# Altium PCB DSP_Board.PcbDoc
Units mil, origin at the board's own origin, x right, y up, seen from the top; angles counter-clockwise.
Board outline 6000 x 4000 mil, 2 copper layers (Top Layer, Bottom Layer); 124 components, 152 nets, 528 pads, 23 vias.
Unrouted connection lines stored in the file: 156.
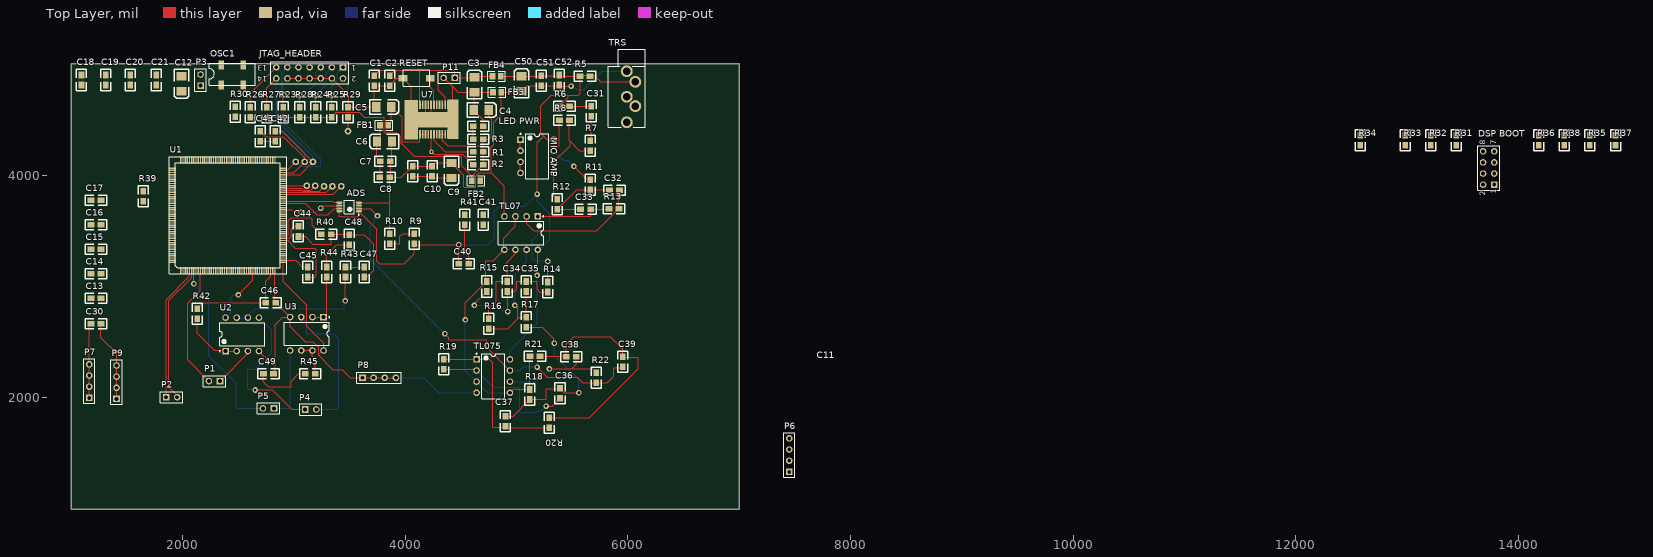
[diagram p0: Top Layer view]
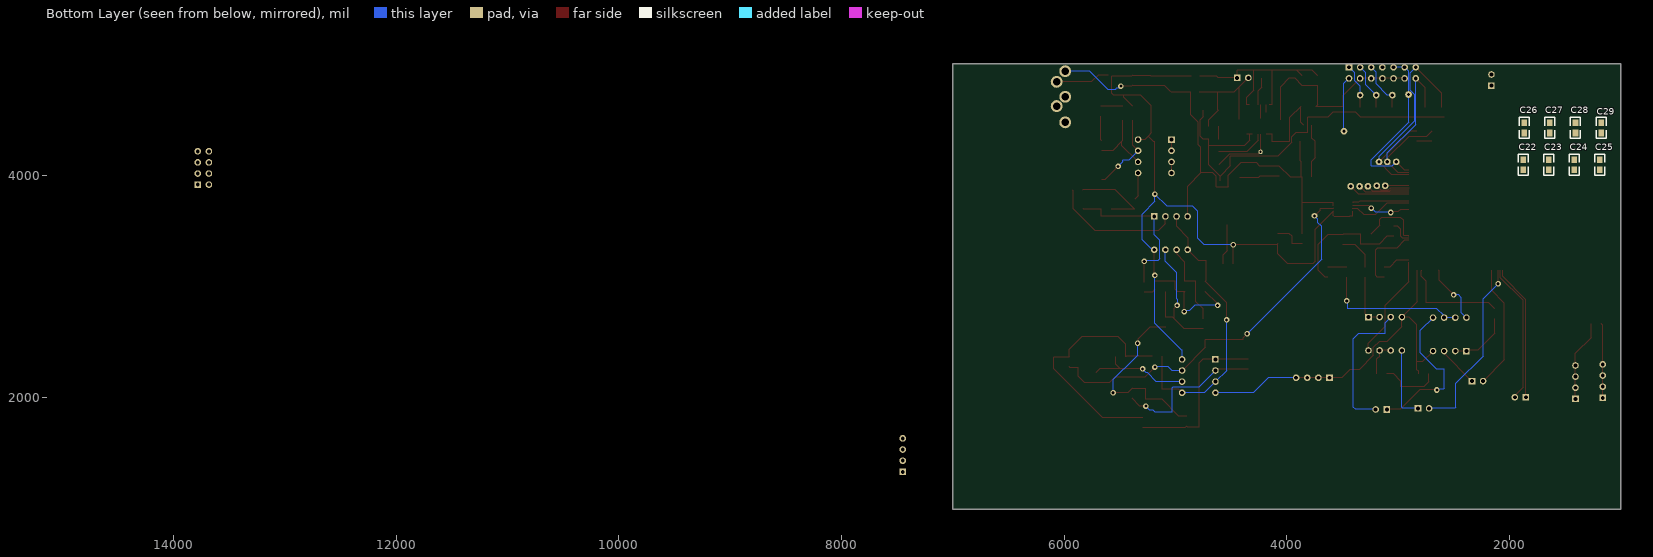
[diagram p1: Bottom Layer view, seen from below]

## Layer stack, top to bottom
Top Solder: solder mask 0.4, Solder Resist, Dk 3.5
Top Layer: signal copper 1.4
Dielectric 1: dielectric 12.6, FR-4, Dk 4.8
Bottom Layer: signal copper 1.4
Bottom Solder: solder mask 0.4, Solder Resist, Dk 3.5

## Board outline
1000,1000 7000,1000 7000,5000 1000,5000

## Design rules (kind name [scope] priority, off if disabled: settings)
Clearance [All] p1: gap=3
PolygonConnect [All] p1: connectstyle=Relief reliefconductorwidth=10 reliefentries=4 polygonreliefangle="90 Angle" airgapwidth=10
RoomDefinition TMS320F28335_DSP [InComponentClass('TMS320F28335_DSP')] p1: confinementstyle=ConfineIn formatcopy=TRUE lockcomponents=FALSE outline 0,0 2000,0 2000,1000 0,1000
RoomDefinition DSP_Power [InComponentClass('DSP_Power')] p2: confinementstyle=ConfineIn formatcopy=TRUE lockcomponents=FALSE outline 0,0 2000,0 2000,1000 0,1000
RoomDefinition DSP_Board_Headers [InComponentClass('DSP_Board_Headers')] p3: confinementstyle=ConfineIn formatcopy=TRUE lockcomponents=FALSE outline 7045,1945 10885,1945 10885,2465 7045,2465
RoomDefinition Audio_ADC [InComponentClass('Audio_ADC')] p4: confinementstyle=ConfineIn formatcopy=TRUE lockcomponents=FALSE outline 7045,1065 14680,1065 14680,1895 7045,1895
RoutingVias [All] p1: holewidth=10 width=20 viastyle="Through Hole" minholewidth=10 minwidth=20 maxholewidth=10 maxwidth=20
SolderMaskExpansion [All] p1: expansion=4
Width "Schematic Width Constraint" [InNet('+D5.0V')] p1: maxlimit=15 minlimit=11 preferedwidth=11
Width [All] p2: maxlimit=6 minlimit=6 preferedwidth=6
30 further rules are at their usual default settings.

## Classes and differential pairs
net class XD[0..15]: XD0 XD1 XD2 XD3 XD4 XD5 XD6 XD7 XD8 XD9 XD10 XD11 XD12 XD13 XD14 XD15
net class XA[0..19]: XA0 XA1 XA2 XA3 XA4 XA5 XA6 XA7 XA8 XA9 XA10 XA11 XA12 XA13 XA14 XA15 XA16 XA17 XA18 XA19
component class TMS320F28335_DSP: C41 C42 C43 C44 C45 "DSP BOOT" JTAG_HEADER OSC1 R23 R24 R25 R26 R27 R28 R29 R30 R31 R32 R33 R34 R35 R36 R37 R38 R39 R40 R41 U1
component class DSP_Power: C1 C2 C3 C4 C5 C6 C7 C8 C9 C10 C11 C12 C13 C14 C15 C16 C17 C18 C19 C20 C21 C22 C23 C24 C25 C26 C27 C28 C29 C30 C50 C51 C52 FB1 FB2 FB3 FB4 "LED PWR" R1 R2 R3 RESET U7
component class DSP_Board_Headers: C46 C47 C48 C49 P1 P2 P3 P4 P5 P6 P7 P8 P9 P11 R42 R43 R44 R45 U2 U3
component class Audio_ADC: ADS C31 C32 C33 C34 C35 C36 C37 C38 C39 C40 "MIC AMP" R5 R6 R7 R8 R9 R10 R11 R12 R13 R14 R15 R16 R17 R18 R19 R20 R21 R22 TL07 TL075 TRS

## Components (designator, comment, footprint, x,y, rotation, side; value= is the part's Value field where it differs from the comment)
ADS "ADS8320" TSOP65P490X110-8N 3495,3715 r180 top (schematic designator *)
C1 "Cap Semi" 0805 3720,4805 r90 top
C2 "Cap Semi" 0805 3860,4805 r90 top
C3 "10uF" 3528 4620,4880 r270 top
C4 "10uF" 3528 4750,4585 r180 top
C5 "10uF" 3528 3875,4615 r180 top
C6 "10uF" 3528 3745,4305 r0 top
C7 "Cap Semi" 0805 3865,4125 r180 top
C8 "Cap Semi" 0805 3860,3980 r180 top
C9 "10uF" 3528 4415,3975 r90 top
C10 "Cap Semi" 0805 4240,4080 r270 top
C11 "Cap Semi" 0805 4065,4080 r270 top
C12 "10uF" 3528 1990,4755 r90 top
C13 "Cap Semi" 0805 1265,2895 r180 top
C14 "Cap Semi" 0805 1265,3115 r180 top
C15 "Cap Semi" 0805 1265,3335 r180 top
C16 "Cap Semi" 0805 1265,3555 r180 top
C17 "Cap Semi" 0805 1265,3775 r180 top
C18 "Cap Semi" 0805 1090,4810 r90 top
C19 "Cap Semi" 0805 1310,4810 r90 top
C20 "Cap Semi" 0805 1530,4810 r90 top
C21 "Cap Semi" 0805 1760,4810 r90 top
C22 "Cap Semi" 0805 1875,4050 r90 bottom
C23 "Cap Semi" 0805 1645,4050 r90 bottom
C24 "Cap Semi" 0805 1415,4050 r90 bottom
C25 "Cap Semi" 0805 1185,4050 r90 bottom
C26 "Cap Semi" 0805 1865,4380 r90 bottom
C27 "Cap Semi" 0805 1635,4380 r90 bottom
C28 "Cap Semi" 0805 1405,4380 r90 bottom
C29 "Cap Semi" 0805 1175,4380 r90 bottom
C30 "Cap Semi" 0805 1265,2665 r180 top
C31 "Cap Semi" 0805 5670,4620 r270 top
C32 "Cap Semi" 0805 5835,3865 r0 top
C33 "Cap Semi" 0805 5575,3695 r0 top
C34 "Cap Semi" 0805 4915,2955 r90 top
C35 "Cap Semi" 0805 5085,3045 r270 top
C36 "Cap Semi" 0805 5390,2085 r270 top
C37 "Cap Semi" 0805 4900,1835 r270 top
C38 "Cap Semi" 0805 5445,2370 r0 top
C39 "Cap Semi" 0805 5955,2370 r270 top
C40 "Cap Semi" 0805 4480,3205 r0 top
C41 "Cap Semi" 0805 4700,3555 r90 top
C42 "Cap Semi" 0805 2830,4305 r90 top
C43 "Cap Semi" 0805 2695,4305 r90 top
C44 "Cap Semi" 0805 3040,3540 r270 top
C45 "Cap Semi" 0805 3125,3085 r90 top
C46 "Cap Semi" 0805 2835,2855 r180 top
C47 "Cap Semi" 0805 3631.25,3085 r90 top
C48 "Cap Semi" 0805 3495,3465 r270 top
C49 "Cap Semi" 0805 2815,2215 r180 top
C50 "10uF" 3528 5045,4890 r270 top
C51 "Cap Semi" 0805 5220,4805 r90 top
C52 "Cap Semi" 0805 5385,4810 r90 top
"DSP BOOT" "Header 4X2" HDR2X4 13785,3915 r90 top
FB1 "Ferrite_Bead" CR2012-0805 3810,4450 r180 top
FB2 "Ferrite_Bead" CR2012-0805 4635,3950 r0 top
FB3 "Ferrite_Bead" CR2012-0805 4825,4745 r0 top
FB4 "Ferrite_Bead" CR2012-0805 4820,4890 r0 top
JTAG_HEADER "Header 7X2" HDR2X7 3440,4970 r180 top
"LED PWR" "LED3" 0805 4610,4440 r0 top
"MIC AMP" "TL072" DIP-8 5185,4170 r0 top
OSC1 "Epson Oscillator" Oscillator 2345,4810 r0 top
P1 "Header 2" HDR1X2 2335,2150 r180 top
P2 "Header 2" HDR1X2 1850,2005 r0 top
P3 "Header 2" HDR1X2 2160,4805 r90 top
P4 "Header 2" HDR1X2 3100,1895 r0 top
P5 "Header 2" HDR1X2 2820,1905 r180 top
P6 "Header 4" HDR1X4 7450,1335 r90 top
P7 "Header 4" HDR1X4 1160,2000 r90 top
P8 "Header 4" HDR1X4 3615,2180 r0 top
P9 "Header 4" HDR1X4 1405,1990 r90 top
P11 "Header 2" HDR1X2 4445,4875 r180 top
R1 "Res" 0805 4610,4210 r0 top
R2 "Res" 0805 4610,4095 r0 top
R3 "Res" 0805 4700,4325 r180 top
R5 "Res" 0805 5570,4890 r0 top
R6 "Res" 0805 5475,4620 r180 top
R7 "Res" 0805 5660,4220 r90 top
R8 "Res" 0805 5385,4495 r0 top
R9 "Res" 0805 4080,3475 r270 top
R10 "Res" 0805 3860,3475 r270 top
R11 "Res" 0805 5660,3870 r90 top
R12 "Res" 0805 5365,3695 r90 top
R13 "Res" 0805 5830,3700 r0 top
R14 "Res" 0805 5280,2950 r90 top
R15 "Res" 0805 4730,3045 r270 top
R16 "Res" 0805 4750,2620 r90 top
R17 "Res" 0805 5085,2635 r90 top
R18 "Res" 0805 5120,2075 r270 top
R19 "Res" 0805 4345,2345 r270 top
R20 "Res" 0805 5295,1820 r270 top
R21 "Res" 0805 5120,2375 r0 top
R22 "Res" 0805 5715,2135 r90 top
R23 "Res" 0805 2905,4610 r270 top
R24 "Res" 0805 3195,4610 r270 top
R25 "Res" 0805 3340,4610 r270 top
R26 "Res" 0805 2605,4520 r90 top
R27 "Res" 0805 2755,4610 r270 top
R28 "Res" 0805 3050,4610 r270 top
R29 "Res" 0805 3485,4520 r90 top
R30 "Res" 0805 2470,4615 r270 top
R31 "Res" 0805 13445,4270 r90 top
R32 "Res" 0805 13215,4270 r90 top
R33 "Res" 0805 12985,4270 r90 top
R34 "Res" 0805 12580,4270 r90 top
R35 "Res" 0805 14645,4270 r90 top
R36 "Res" 0805 14185,4270 r90 top
R37 "Res" 0805 14875,4270 r90 top
R38 "Res" 0805 14415,4270 r90 top
R39 "Res" 0805 1645,3765 r90 top
R40 "Res" 0805 3335,3470 r180 top
R41 "Res" 0805 4535,3645 r270 top
R42 "Res" 0805 2130,2710 r90 top
R43 "Res" 0805 3462.5,3085 r90 top
R44 "Res" 0805 3293.75,3085 r90 top
R45 "Res" 0805 3190,2215 r180 top
RESET "SW-PB" SWITCH_2PAD_SMD 3980,4870 r0 top
TL07 "BPFS1" DIP-8 5040,3480 r270 top
TL075 "BPFS3" DIP-8 4790,2195 r0 top
TRS "3.5mm jack GM" "3.5mm jack GM" 5990,4935 r180 top
U1 "TMS320F28335GF" QFP176 2405,3640 r90 top
U2 "LT1632CN8" DIP-8 2535,2570 r90 top
U3 "LT1632CN8" DIP-8 3115,2575 r270 top
U7 "TPS70351" PWP24 4240,4500 r270 top

## Footprints (in the part's own frame and the unit in brackets; to place one, negate y for a bottom-side part, rotate by r counter-clockwise, add the part's x,y. Pads: shape width x height; smd on the part's side, far side on the other; paste and mask are expansions set on the pad)
"3.5mm jack GM" [mil]
  round 106.5 hole 66.5: 1(0,0) 2(-77,96) 3(0,230) 4(-77,314) 5(0,460)
  silkscreen extent -165,-195 165,505
0805 [mil]
  rect 60x50 smd: 1(0,0) 2(90,0)
  silkscreen extent -50,-45 140,45
3528 [mil]
  rect 75x90 smd: 1(0,0) 2(135,0)
  silkscreen extent -65,-65 195,65
CR2012-0805 [mm]
  rect 1.3x1.5 smd: 1(-0.95,0) 2(0.95,0)
  silkscreen extent -2,-1.15 2,1.15
DIP-8 [mm] "DIP; 8 Leads; Row Spacing 7.62 mm; Pitch 2.54 mm"
  rect 1.5x1.5 hole 0.9: 1(-3.81,3.81)
  round 1.5 hole 0.9: 2(-3.81,1.27) 3(-3.81,-1.27) 4(-3.81,-3.81) 5(3.81,-3.81) 6(3.81,-1.27) 7(3.81,1.27) 8(3.81,3.81)
  silkscreen extent -3.93,-5.15 2.65,5.23, body extent -3.6,-5.15 3.6,5.15, height 5.08
HDR1X2 [mm] "Connector; Header; 2 Position"
  rect 1.5x1.5 hole 0.9: 1(0,0)
  round 1.5 hole 0.9: 2(2.54,0)
  silkscreen extent -1.27,-1.27 3.81,1.27
HDR1X4 [mm] "Connector; Header; 4 Position"
  rect 1.5x1.5 hole 0.9: 1(0,0)
  round 1.5 hole 0.9: 2(2.54,0) 3(5.08,0) 4(7.62,0)
  silkscreen extent -1.27,-1.27 8.89,1.27
HDR2X4 [mm] "Connector; Header; 4x2 Position"
  rect 1.5x1.5 hole 0.9: 1(0,0)
  round 1.5 hole 0.9: 2(0,2.54) 3(2.54,0) 4(2.54,2.54) 5(5.08,0) 6(5.08,2.54) 7(7.62,0) 8(7.62,2.54)
  silkscreen extent -1.27,-1.27 8.89,3.81
HDR2X7 [mm] "Connector; Header; 7x2 Position"
  rect 1.5x1.5 hole 0.9: 1(0,0)
  round 1.5 hole 0.9: 2(0,2.54) 3(2.54,0) 4(2.54,2.54) 5(5.08,0) 6(5.08,2.54) 7(7.62,0) 8(7.62,2.54) 9(10.16,0) 10(10.16,2.54) 11(12.7,0) 12(12.7,2.54) 13(15.24,0) 14(15.24,2.54)
  silkscreen extent -1.27,-1.27 16.51,3.81
Oscillator [mm]
  rect 1.3x2.1 smd: 1(0,0) 2(5.08,0) 3(5.08,4.6) 4(0,4.6)
  silkscreen extent -2.67,0 7.83,5
PWP24 [mm]
  rect 1.95x0.4 smd: 1(-3.366,3.632) 2(-3.366,2.997) 3(-3.366,2.352) 4(-3.365,1.712) 5(-3.365,1.072) 6(-3.365,0.432) 7(-3.365,-0.208) 8(-3.365,-0.848) 9(-3.365,-1.488) 10(-3.365,-2.128) 11(-3.365,-2.768) 12(-3.365,-3.48) 13(3.366,-3.48) 14(3.358,-2.768) 15(3.358,-2.128) 16(3.358,-1.488) 17(3.358,-0.848) 18(3.358,-0.208) 19(3.358,0.432) 20(3.358,1.072) 21(3.358,1.712) 22(3.358,2.352) 23(3.365,2.997) 24(3.365,3.632)
  rect 9x2.54 smd: 1(-0.064,4.75)
  rect 3.5x7.9 smd: 1(0.063,0.203)
  rect 9x3 smd: 1(0.064,-4.75)
QFP176 [mil]
  rect 63x11.8 smd: 1(-496.1,423.2) 2(-496.1,403.5) 3(-496.1,383.9) 4(-496.1,364.2) 5(-496.1,344.5) 6(-496.1,324.8) 7(-496.1,305.1) 8(-496.1,285.4) 9(-496.1,265.7) 10(-496.1,246.1) 11(-496.1,226.4) 12(-496.1,206.7) 13(-496.1,187) 14(-496.1,167.3) 15(-496.1,147.6) 16(-496.1,128) 17(-496.1,108.3) 18(-496.1,88.6) 19(-496.1,68.9) 20(-496.1,49.2) 21(-496.1,29.5) 22(-496.1,9.8) 23(-496.1,-9.8) 24(-496.1,-29.5) 25(-496.1,-49.2) 26(-496.1,-68.9) 27(-496.1,-88.6) 28(-496.1,-108.3) 29(-496.1,-128) 30(-496.1,-147.6) 31(-496.1,-167.3) 32(-496.1,-187) 33(-496.1,-206.7) 34(-496.1,-226.4) 35(-496.1,-246.1) 36(-496.1,-265.7) 37(-496.1,-285.4) 38(-496.1,-305.1) 39(-496.1,-324.8) 40(-496.1,-344.5) 41(-496.1,-364.2) 42(-496.1,-383.9) 43(-496.1,-403.5) 44(-496.1,-423.2) 89(496.1,-423.2) 90(496.1,-403.5) 91(496.1,-383.9) 92(496.1,-364.2) 93(496.1,-344.5) 94(496.1,-324.8) 95(496.1,-305.1) 96(496.1,-285.4) 97(496.1,-265.7) 98(496.1,-246.1) 99(496.1,-226.4) 100(496.1,-206.7) 101(496.1,-187) 102(496.1,-167.3) 103(496.1,-147.6) 104(496.1,-128) 105(496.1,-108.3) 106(496.1,-88.6) 107(496.1,-68.9) 108(496.1,-49.2) 109(496.1,-29.5) 110(496.1,-9.8) 111(496.1,9.8) 112(496.1,29.5) 113(496.1,49.2) 114(496.1,68.9) 115(496.1,88.6) 116(496.1,108.3) 117(496.1,128) 118(496.1,147.6) 119(496.1,167.3) 120(496.1,187) 121(496.1,206.7) 122(496.1,226.4) 123(496.1,246.1) 124(496.1,265.7) 125(496.1,285.4) 126(496.1,305.1) 127(496.1,324.8) 128(496.1,344.5) 129(496.1,364.2) 130(496.1,383.9) 131(496.1,403.5) 132(496.1,423.2)
  rect 11.8x63 smd: 45(-423.2,-496.1) 46(-403.5,-496.1) 47(-383.9,-496.1) 48(-364.2,-496.1) 49(-344.5,-496.1) 50(-324.8,-496.1) 51(-305.1,-496.1) 52(-285.4,-496.1) 53(-265.7,-496.1) 54(-246.1,-496.1) 55(-226.4,-496.1) 56(-206.7,-496.1) 57(-187,-496.1) 58(-167.3,-496.1) 59(-147.6,-496.1) 60(-128,-496.1) 61(-108.3,-496.1) 62(-88.6,-496.1) 63(-68.9,-496.1) 64(-49.2,-496.1) 65(-29.5,-496.1) 66(-9.8,-496.1) 67(9.8,-496.1) 68(29.5,-496.1) 69(49.2,-496.1) 70(68.9,-496.1) 71(88.6,-496.1) 72(108.3,-496.1) 73(128,-496.1) 74(147.6,-496.1) 75(167.3,-496.1) 76(187,-496.1) 77(206.7,-496.1) 78(226.4,-496.1) 79(246.1,-496.1) 80(265.7,-496.1) 81(285.4,-496.1) 82(305.1,-496.1) 83(324.8,-496.1) 84(344.5,-496.1) 85(364.2,-496.1) 86(383.9,-496.1) 87(403.5,-496.1) 88(423.2,-496.1) 133(423.2,496.1) 134(403.5,496.1) 135(383.9,496.1) 136(364.2,496.1) 137(344.5,496.1) 138(324.8,496.1) 139(305.1,496.1) 140(285.4,496.1) 141(265.7,496.1) 142(246.1,496.1) 143(226.4,496.1) 144(206.7,496.1) 145(187,496.1) 146(167.3,496.1) 147(147.6,496.1) 148(128,496.1) 149(108.3,496.1) 150(88.6,496.1) 151(68.9,496.1) 152(49.2,496.1) 153(29.5,496.1) 154(9.8,496.1) 155(-9.8,496.1) 156(-29.5,496.1) 157(-49.2,496.1) 158(-68.9,496.1) 159(-88.6,496.1) 160(-108.3,496.1) 161(-128,496.1) 162(-147.6,496.1) 163(-167.3,496.1) 164(-187,496.1) 165(-206.7,496.1) 166(-226.4,496.1) 167(-246.1,496.1) 168(-265.7,496.1) 169(-285.4,496.1) 170(-305.1,496.1) 171(-324.8,496.1) 172(-344.5,496.1) 173(-364.2,496.1) 174(-383.9,496.1) 175(-403.5,496.1) 176(-423.2,496.1)
  silkscreen extent -528,-528 528,528
SWITCH_2PAD_SMD [mm]
  rect 2x1.5 smd: 1(0,0) 2(6.2,0)
  silkscreen extent 0,-1.78 6.1,1.92
TSOP65P490X110-8N [mm] "TSOP, 8-Leads, Body 3.00x3.00mm, Pitch 0.65mm, IPC Medium Density"
  oval 1.35x0.5 smd: 1(-2.225,0.975) 2(-2.225,0.325) 3(-2.225,-0.325) 4(-2.225,-0.975) 5(2.225,-0.975) 6(2.225,-0.325) 7(2.225,0.325) 8(2.225,0.975)
  silkscreen extent -2.35,-1.55 1.15,1.9, body extent -1.55,-1.55 1.55,1.55, height 1.1

## Part data
C1 C2 C7 C8 C10 C11 C13 C14 C15 C16 C17 C18 C19 C20 C21 C22 C23 C24 C25 C26 C27 C28 C29 C30 C31 C32 C33 C34 C35 C36 C37 C38 C39 C40 C41 C42 C43 C44 C45 C46 C47 C48 C49 C51 C52: "Capacitor (Semiconductor SIM Model)"
C3: library part "CAPACITOR POL", "digi-399-1563-1-ND"
C4 C6 C9 C50: library part "CAPACITOR POL", "digi-399-3096-1-ND"
C5 C12: library part "CAPACITOR POL", "digi-399-1576-1-ND"
"DSP BOOT": "Header, 4-Pin, Dual row"
FB1 FB2 FB3 FB4: "Ferrite Bead"
JTAG_HEADER: "Header, 7-Pin, Dual row"
"LED PWR": "Typical BLUE SiC LED"
"MIC AMP" TL07 TL075: library part LT1632CN8, "45MHz, 45V/µs, Dual Rail-to-Rail Input and Output Precision Operational Amplifier"
OSC1: library part Oscillator, "15Mhz Epson Clock"
P1 P2 P3 P4 P5 P11: "Header, 2-Pin"
P6 P7 P8 P9: "Header, 4-Pin"
R1 R2 R3 R5 R6 R7 R8 R9 R10 R11 R12 R13 R14 R15 R16 R17 R18 R19 R20 R21 R22 R23 R24 R25 R26 R27 R28 R29 R30 R31 R32 R33 R34 R35 R36 R37 R38 R39 R40 R41 R42 R43 R44 R45: library part "Res Semi", "Semiconductor Resistor"
RESET: "Switch"
U1: library part TMS320F283XXPGF_23, "Texas Instruments F28335"
U2 U3: "45MHz, 45V/µs, Dual Rail-to-Rail Input and Output Precision Operational Amplifier"
U7: "IC 3.3V/1.8V LDO REG 24-HTSSOP"

## Free pads (board coordinates)
  round 40 hole 20: 2(4235,4210)
  round 60 hole 30: 4(3340,4720) 5(3195,4720) 6(3050,4720) 8(3485,4395) 9(2905,4725) 20(3015,4120) 21(3095,4120) 22(3170,4120) 23(3115,3905) 24(3190,3905) 25(3270,3900) 26(3345,3900) 27(3425,3900)

## Via types
v1: diameter 50, hole 28, Top Layer to Bottom Layer, 23 vias

## Nets (pads, with @x,y where several pads share a name; then routed paths per layer and width w, separated by ;. In a path a pad name is that pad's centre, name@x,y a point inside that pad or via, vN(x,y) a via of type N, cw(c..) or ccw(c..) an arc to the next point about the centre after c; other vN are vias at no path point)
+A1.8V: C6.1 C7.2 C8.2 FB1.2 U1.31 U1.59 | length 488.9
  Top Layer w6: FB1.2 3772.6,4332.6 C6.1 3745,4155 C7.2 C8.2@3775,3985
+A2.5V: "MIC AMP.5" R9.1 R10.2 R12.2 R15.1 R18.1 R21.1 TL07.3 TL07.5 TL075.3 TL075.5 | length 3135.8
  Top Layer w6: R10.2 3950,3385 3950,3450 3975,3475 R9.1 ; v1(4540,2700) 4540,2855 R15.1 4725,3050 4725,3230 4790,3230 TL07.5 4885,3335 4885,3435 4990,3540 TL07.3 ; TL075.5 4970,2075 R18.1 R21.1 ; 5335,4020 5335,3815 R12.2
  Bottom Layer w6: v1(4540,2700) 4540,2245 TL075.3 4740,2045 TL075.5
+A3.3V: C9.1 C10.2 C11.2 FB2.2 U1.34 U1.45 U2.8 U3.8 | length 1856.1
  Top Layer w6: v1(2500,2925) 2630,3055 2630,3142.5 U1.34 ; U1.45 2901.1,3043.9 3112.5,2832.5 3112.5,2642.5 3265,2490 U3.8 ; C11.2 C10.2 4255,3975 C9.1 C9.1@4420,3975
  Bottom Layer w6: U2.8 2430,2765 2430,2900 2455,2925 v1(2500,2925)
+A5.0V: "MIC AMP.8" ADS.1 ADS.8 C40.1 C50.1 C51.2 C52.2 FB4.2 R5.1 R6.2 R9.2 TL07.8 TL075.8 | length 6909.3
  Top Layer w6: ADS.8 3407.4,3632.6 3410,3630 3435,3630 3440,3625 3570,3625 3582.6,3637.6 ADS.1 3745,3514.21 3745,3225 3765,3205 3990,3205 4080,3295 R9.2 4090,3375 v1(4480,3375) C40.1 ; FB4.2 C50.1 5215,4890 C51.2 5380,4895 C52.2 5395,4890 R5.1 5570,4735 5555,4720 5465,4720 ; v1(5185,3100) 5190,3105 TL07.8 ; v1(5185,3830) 5185,4300 5195,4300 5245,4350 ; 5335,4320 5275,4320 5245,4350 ; R6.2 5465,4700 5465,4720 ; 5245,4350 5215,4380 5215,4625 5310,4720 5465,4720
  Bottom Layer w6: v1(4480,3375) 4740,3375 4800,3435 4800,3675 4845,3720 5075,3720 v1(5185,3830) 5185,3765 5300,3650 5300,3420 5210,3330 TL07.8 ; TL075.8 4940,2427.5 4942.5,2427.5 5185,2670 v1(5185,3100)
+D1.8V: C5.1 C12.1 C13.2 C14.2 C15.2 C16.2 C17.2 C18.2 C19.2 C20.2 C21.2 FB1.1 U1.4 U1.15 U1.23 U1.29 U1.61 U1.101 U1.109 U1.117 U1.126 U1.139 U1.146 U1.154 U1.167 U7.14 U7.15 U7.16 | length 807.3
  Top Layer w6: FB1.1 3875,4477.6 C5.1 3971.02,4518.98 3971.02,4301.02 4131.02,4301.02 U7.14 U7.15 U7.16
+D3.3V: C4.1 C22.2 C23.2 C24.2 C25.2 C26.2 C27.2 C28.2 C29.2 C30.2 FB2.1 OSC1.1 OSC1.4 P7.1 P7.2 P7.3 P7.4 R1.2 R2.2 R3.1 R23.2 R24.2 R25.2 R26.1 R27.2 R28.2 R35.1 R36.1 R37.1 R38.1 U1.9 U1.71 U1.84 U1.93 U1.107 U1.121 U1.143 U1.159 U1.170 U7.21 U7.22 U7.23 | length 5241.4
  Top Layer w6: P7.1 P7.2 P7.3 P7.4 1160,2650 C30.2 ; R27.2@2735,4520 R26.1@2585,4520 ; R23.2@2885,4520 R26.1@2585,4520 ; R28.2@3035,4520 R26.1@2585,4520 ; U7.21 U7.22 ; U7.23@4357.72,4367.78 U7.22 ; FB2.1 4597.6,3992.6 ; C4.1 4750,4525 4775,4500 4775,4350 4750,4325 R3.1 4700,4265 ; R26.1@2585,4520 3335,4520 3380,4565 3585,4565 3630,4520 3810,4520 3810,4380 3920,4380 3955,4345 3955,4295 4080,4170 4505,4170 4505,4085.2 4597.6,3992.6 ; U7.22 4332.6,4312.4 4380,4265 4700,4265 ; 4597.6,3992.6 R2.2 R1.2 4700,4265
+D5.0V: C1.2 C2.2 C3.1 FB4.1 P6.1 P6.2 P6.3 P6.4 P11.1 U7.2 U7.3 U7.10 U7.11 | length 1929.7
  Top Layer w11: C1.2 3770,4945 3910,4945 ; C2.2 3910,4945 ; U7.10@4155.2,4633.52 4130,4633.52 4130,4945 ; U7.3@4334.61,4634.51 4360,4634.51 4360,4700 4295,4765 4295,4945 ; FB4.1 4630,4890 C3.1 4615,4875 P11.1 4445,4945 4295,4945 ; 3910,4945 4130,4945 ; 4130,4945 4295,4945
/RST_SWITCH: RESET.2 U7.6 | length 251.1
  Top Layer w6: RESET.2 4224.09,4790.91 4257.01,4757.99 U7.6
ADCINA0: C46.2 R42.2 U1.42 | length 945.8
  Top Layer w6: R42.2 2185,2855 C46.2 2745,3045 2790,3090 2790,3142.8 U1.42
ADCINA1: C47.2 R43.2 U1.41 | length 168.8
  Top Layer w6: R43.2 C47.2
ADCINA2: C48.2 R44.2 U1.40 | length 347.8
  Top Layer w6: R44.2 3293.75,3283.75 3385,3375 C48.2
ADCINA3: C49.2 R45.2 U1.39 | length 540.6
  Top Layer w6: C49.2 2725,2145 2770,2100 2975,2100 2975,2150 3040,2215 R45.2
ADCREFIN: U1.54
ADCREFM: C45.1 U1.55 | length 644.7
  Top Layer w6: U1.55 2941.4,3413.6 3010,3345 3185,3345 3200,3330 3200,3100 3185,3085 C45.1
ADCREFP: C44.1 U1.56 | length 221.2
  Top Layer w6: U1.56 2958.3,3433.3 2975,3450 2975,3515 3000,3540 C44.1
ADCRESEXT: R40.2 U1.57 | length 586.5
  Top Layer w6: U1.57 2903.1,3455 2945,3455 2950,3460 2950,3595 2975,3620 3150,3620 3165,3605 3165,3550 R40.2
ADS_CSN: ADS.5 U1.73 | length 512.4
  Top Layer w6: U1.73 3342,3768 3355,3755 3405.79,3755 ADS.5
ADS_DCLK: ADS.7 U1.72 | length 572.8
  Top Layer w6: U1.72 3101.7,3748.3 3205,3645 3305,3645 3360,3700 3405.2,3700 ADS.7
ADS_DOUT: ADS.6 U1.69 | length 542.3
  Top Layer w6: U1.69 2980.8,3689.2 3000,3670 3060,3670 v1(3065,3665) ; v1(3240,3705) 3260,3725 3285,3725 3287.8,3727.8 ADS.6
  Bottom Layer w6: v1(3065,3665) 3200,3665 v1(3240,3705)
AGND: "MIC AMP.3" "MIC AMP.4" ADS.3 ADS.4 C6.2 C7.1 C8.1 C9.2 C10.1 C11.1 C44.2 C45.2 C46.1 C47.1 C48.1 C49.1 C50.2 C51.1 C52.1 FB3.2 P8.1 P8.2 P8.3 P8.4 R10.1 R40.1 TL07.4 TL075.4 TRS.1 U1.32 U1.33 U1.35 U1.36 U1.37 U1.38 U1.43 U1.44 U1.46 U1.47 U1.48 U1.49 U1.50 U1.51 U1.52 U1.53 U1.58 U2.4 U3.4 | length 9641
  Top Layer w6: U2.4 2780,2325 2830,2325 ; C49.1 2815,2238.75 2830,2253.75 2830,2325 ; U1.44 2828.2,2861.8 C46.1 U3.4 ; U1.46 2902.6,3235 3015,3235 3075,3175 C45.2 ; C44.2 3100,3450 3170,3380 3335,3380 R40.1 3490,3470 C48.1 3630,3465 3715,3380 3715,3145 3655,3085 C47.1 ; ADS.3 ADS.4 3858.39,3753.39 3860,3755 ; R10.1 3860,3755 ; C8.1@3870,3990 3870,4120 3880,4130 C6.2 ; P8.4 P8.3 P8.2 P8.1 3505,2180 3435,2250 3350,2250 3220,2380 3220,2455 3170,2505 3100,2505 2965,2640 U3.4 ; TL07.4 4890,3900 4770,4020 ; 5035,4020 5035,4120 ; v1(5490,4800) 5395,4800 C52.1 5380,4805 C51.1 5095,4805 C50.2 5035,4745 FB3.2 4862.4,4542.4 4795,4475 4795,4275 4770,4250 4770,4020 ; 2830,2325 2830,2655 2900,2725 U3.4 ; 3860,3755 C8.1 3965,3980 C11.1 C10.1 4270,4110 C9.2 4525,4000 4525,3895 4530,3890 4630,3890 4635,3895 4635,3990 4665,4020 4770,4020
  Bottom Layer w6: P8.4 4165,2180 4300,2045 TL075.4 ; v1(5490,4800) 5510,4780 5530,4780 5540,4770 5605,4770 5770,4935 TRS.1
EMU0_DSP: C42.2 JTAG_HEADER.13 pad.22 R26.2 U1.85 | length 2247.9
  Top Layer w6: R26.2 2605,4735 JTAG_HEADER.13 ; C42.2 2895,4395 pad.22 3054.2,4004.2 U1.85
  Bottom Layer w6: JTAG_HEADER.13 2890,4920 2890,4765 2850,4725 2850,4490 3170,4170 pad.22
EMU1_DSP: C43.2 JTAG_HEADER.14 pad.21 R27.1 U1.86 | length 1918.9
  Top Layer w6: C43.2 2745,4345 2905,4345 3095,4155 pad.21 2998.9,4023.9 U1.86 ; R27.1 2755,4785 JTAG_HEADER.14
  Bottom Layer w6: JTAG_HEADER.14 2840,4455 3095,4200 pad.21
"FILTER OUT": ADS.2 C39.2 R22.1 TL075.7 | length 3533.5
  Top Layer w6: ADS.2 3584.8,3700 3700,3700 3700,3685 v1(3750,3635) ; v1(4355,2575) 4390,2540 4390,2520 4730,2520 4730,2455 TL075.7 ; v1(5185,2275) 5275,2185 5545,2185 5595,2135 R22.1 5815,2135 5875,2195 5875,2270 5945,2270 C39.2
  Bottom Layer w6: v1(3750,3635) 3720,3605 3720,3575 3685,3540 3685,3245 v1(4355,2575) ; TL075.7 5030,2245 5065,2280 5180,2280 v1(5185,2275)
GND: "LED PWR.2" C1.1 C2.1 C3.2 C4.2 C5.2 C12.2 C13.1 C14.1 C15.1 C16.1 C17.1 C18.1 C19.1 C20.1 C21.1 C22.1 C23.1 C24.1 C25.1 C26.1 C27.1 C28.1 C29.1 C30.1 C40.2 C41.1 C42.1 C43.1 FB3.1 JTAG_HEADER.4 JTAG_HEADER.6 JTAG_HEADER.8 JTAG_HEADER.10 JTAG_HEADER.12 OSC1.2 P9.1 P9.2 P9.3 P9.4 P11.2 R29.2 R31.2 R32.2 R33.2 R34.2 R41.2 RESET.1 U1.3 U1.8 U1.14 U1.22 U1.30 U1.60 U1.70 U1.83 U1.92 U1.103 U1.104 U1.106 U1.108 U1.118 U1.120 U1.125 U1.140 U1.144 U1.147 U1.155 U1.160 U1.166 U1.171 U7.1 U7.7 U7.9 U7.12 U7.13 U7.24 | length 4404
  Top Layer w6: C30.1 1265,2540 1405,2400 P9.4 P9.3 P9.2 P9.1 ; C43.1 C42.1 ; JTAG_HEADER.12 JTAG_HEADER.10 JTAG_HEADER.8 JTAG_HEADER.6 JTAG_HEADER.4 3490,4720 3490,4615 C5.2 3720,4635 C1.1 C2.1 3925,4870 RESET.1 4052.99,4797.01 U7.1@4052.99,4497.5 ; U7.1@4181.42,4564.07 U7.9 ; U7.1@4231.81,4513.68 U7.7 ; P11.2 4427.01,4792.99 ; U7.1@4427.01,4502.5 4427.01,4792.99 ; R41.2 4535,3320 4570,3285 C40.2 ; 4700,4440 4700,4500 C4.2 4620,4590 C3.2 ; FB3.1 C3.2 ; 4427.01,4792.99 4475,4745 C3.2
GPIO4: U1.11
GPIO5: U1.12
GPIO6: U1.13
GPIO7: U1.16
GPIO8: U1.17
GPIO9: U1.18
GPIO10: U1.19
GPIO11: U1.20
GPIO12: U1.21
GPIO13: U1.24
GPIO14: U1.25
GPIO15: U1.26
GPIO16: U1.27
GPIO17: U1.28
GPIO18: U1.62
GPIO19: U1.63
GPIO20: U1.64
GPIO21: U1.65
GPIO22: U1.66
GPIO23: U1.67
GPIO24: U1.68
GPIO32: U1.74
GPIO33: U1.75
GPIO48: U1.88
GPIO49: U1.89
GPIO50: U1.90
GPIO51: U1.91
GPIO52: U1.94
GPIO53: U1.95
GPIO54: U1.96
GPIO55: U1.97
GPIO56: U1.98
GPIO57: U1.99
GPIO58: U1.100
GPIO59: U1.110
GPIO60: U1.111
GPIO61: U1.112
LED_ENABLE: P2.2 U1.6 | length 1255
  Top Layer w6: P2.2 1950,2020 1875,2095 1875,2875 2080.2,3080.2 U1.6
LIGHTSENSE: P4.2 U3.3 | length 1297.6
  Bottom Layer w6: U3.3 3115,2675 3115,2575 3355,2575 3400,2530 3400,1915 3380,1895 P4.2
LOCK_ENABLE: P1.2 U1.10 | length 1119.8
  Top Layer w6: U1.10 2158.9,2965 2045,2851.1 2045,2340 P1.2
MAGSENSE: P1.1 U2.3 | length 373.6
  Top Layer w6: P1.1 2585,2400 U2.3
"MIC OUT": "MIC AMP.7" R8.1 R11.2 | length 737.2
  Top Layer w6: 5335,4220 5385,4270 R8.1 ; v1(5515,4080) 5635,3960 R11.2
  Bottom Layer w6: 5335,4220 5420,4135 5475,4135 5475,4120 v1(5515,4080)
NetC31_1: C31.1 R6.1 TRS.4 | length 195
  Top Layer w6: R6.1 C31.1
NetC31_2: C31.2 R7.2 | length 224.1
  Top Layer w6: R7.2 5670,4320 C31.2
NetC32_1: C32.1 C33.1 R11.1 R12.1 | length 754.6
  Top Layer w6: C33.1 R12.1 5540,3870 R11.1 5830,3870 C32.1
NetC32_2: C32.2 R13.2 TL07.2 | length 1171.8
  Top Layer w6: TL07.2 5090,3565 5155,3500 5720,3500 R13.2 5920,3860 C32.2
NetC33_2: C33.2 R13.1 R14.2 TL07.1 | length 1443.1
  Top Layer w6: TL07.1 5665,3630 C33.2 5825,3695 R13.1 ; R14.2 v1(5280,3225)
  Bottom Layer w6: TL07.1 5190,3465 5140,3415 5140,3250 5160,3230 5275,3230 v1(5280,3225)
NetC34_1: C34.1 C35.1 R14.1 R15.2 | length 1199.1
  Top Layer w6: v1(4620,2830) 4620,2845 R15.2 ; v1(4920,2775) 4920,2950 C34.1 4980,2955 5000,2975 5000,3045 C35.1 5185,3045 5185,2975 5210,2950 R14.1
  Bottom Layer w6: v1(4620,2830) 4825,2830 4875,2780 4915,2780 v1(4920,2775)
NetC34_2: C34.2 R16.2 TL07.6 | length 778
  Top Layer w6: R16.2 4750,2800 4815,2865 4815,3045 C34.2 4915,3220 4990,3295 TL07.6
NetC35_2: C35.2 R16.1 R17.2 TL07.7 | length 1286.5
  Top Layer w6: R16.1 4920,2620 5010,2710 ; v1(4985,2830) 5010,2805 5010,2710 ; C35.2 R17.2 5025,2725 5010,2710
  Bottom Layer w6: v1(4985,2830) 4980,2835 4980,2880 4990,2890 4990,3125 5090,3225 TL07.7
NetC36_1: C36.1 C37.1 R17.1 R18.2 | length 1710.4
  Top Layer w6: C37.1 4970,1835 R18.2 5265,1985 5265,2080 5385,2080 C36.1 5430,2045 v1(5560,2045) ; R17.1 5230,2635 5335,2530 5335,2495 v1(5340,2490)
  Bottom Layer w6: v1(5340,2490) 5340,2380 5465,2255 5470,2255 5560,2165 v1(5560,2045)
NetC36_2: C36.2 R19.2 TL075.2 | length 1385.1
  Top Layer w6: R19.2 4630,2255 TL075.2 ; v1(5265,1925) 5320,1925 C36.2
  Bottom Layer w6: TL075.2 4790,2095 5025,2095 5030,2090 5030,1870 5180,1870 5200,1890 5230,1890 v1(5265,1925)
NetC37_2: C37.2 R19.1 R20.2 TL075.1 | length 1552.8
  Top Layer w6: R19.1 TL075.1 4755,2345 4785,2315 4785,1735 4890,1735 C37.2 4915,1730 R20.2
NetC38_1: C38.1 C39.1 R20.1 R21.2 | length 2228
  Top Layer w6: R21.2 5440,2375 C38.1 5445,2480 5515,2550 5840,2550 5955,2435 C39.1 5960,2365 6095,2365 6095,2260 5655,1820 R20.1
NetC38_2: C38.2 R22.2 TL075.6 | length 963.7
  Top Layer w6: v1(5295,2260) 5495,2260 ; C38.2 5535,2300 5495,2260 ; R22.2 5680,2260 5495,2260
  Bottom Layer w6: TL075.6 5170,2145 5250,2225 5260,2225 v1(5295,2260)
"NetDSP BOOT_1": "DSP BOOT.1" R31.1
"NetDSP BOOT_3": "DSP BOOT.3" R32.1
"NetDSP BOOT_5": "DSP BOOT.5" R33.1
"NetDSP BOOT_7": "DSP BOOT.7" R34.1
NetJTAG_HEADER_5: JTAG_HEADER.5 pad.6 R28.1 | length 465.1
  Top Layer w6: R28.1 pad.6
  Bottom Layer w6: pad.6 3095,4720 3195,4820 3195,4925 JTAG_HEADER.5
"NetLED PWR_1": "LED PWR.1" R3.2 | length 115
  Top Layer w6: R3.2 4610,4440
"NetMIC AMP_1": "MIC AMP.1" "MIC AMP.2" | length 100
  Top Layer w6: 5035,4220 5035,4320
"NetMIC AMP_6": "MIC AMP.6" R7.1 R8.2 | length 652.3
  Top Layer w6: 5335,4120 5480,4265 5480,4305 ; R8.2 5475,4310 5480,4305 ; R7.1 5565,4220 5480,4305
NetOSC1_3: OSC1.3 R30.1
NetR5_2: R5.2 TRS.2 | length 490.2
  Top Layer w6: 5605,4900 5695,4900 5750,4845 5750,4840 6066,4840 TRS.2
NetR39_1: R39.1 U1.138
NetR42_1: R42.1 U2.1 U2.2 | length 551.3
  Top Layer w6: R42.1 2130,2580 2285,2425 2380,2425 U2.1 U2.2
NetR43_1: R43.1 U2.6 U2.7 | length 1297.1
  Top Layer w6: v1(3460,2870) 3460,3082.5 R43.1
  Bottom Layer w6: U2.7 U2.6 2585,2735 2650,2800 3450,2800 3450,2860 v1(3460,2870)
NetR44_1: R44.1 U3.1 U3.2 | length 471.9
  Top Layer w6: U3.2 U3.1 3293.75,2753.75 R44.1
NetR45_1: R45.1 U3.6 U3.7 | length 320.4
  Top Layer w6: U3.6 U3.7 3165,2375 3190,2350 R45.1
PG1: R1.1 U7.19 | length 450.4
  Top Layer w6: U7.19 4257.01,4312.99 4360,4210 R1.1
PRESSURESENSE: P5.1 U3.5 | length 659.1
  Bottom Layer w6: P5.1 2955,1905 2965,1915 U3.5
PWM_FAN: P2.1 U1.5 | length 1226.1
  Top Layer w6: P2.1 1850,2880 2060,3090 2060,3143.4 U1.5
PWM_PUMP: P5.2 U1.7 | length 1630.5
  Top Layer w6: U1.7 2099.9,3025.1 v1(2100,3025)
  Bottom Layer w6: v1(2100,3025) 2235,2890 2235,2375 2480,2130 2480,1915 2490,1905 P5.2
TCK_DSP: JTAG_HEADER.9 JTAG_HEADER.11 pad.9 pad.20 R23.1 U1.87 | length 1641.9
  Top Layer w6: U1.87 2938.5,4043.5 pad.20 ; R23.1@2904.47,4610.53 R23.1 ; R23.1@2905,4611.06 pad.9
  Bottom Layer w6: pad.9@2904.47,4725.53 2904.47,4934.47 JTAG_HEADER.11 JTAG_HEADER.9 ; pad.9 2905,4475 3240,4140 3240,4085 3235,4080 3055,4080 pad.20
TDI_DSP: JTAG_HEADER.3 pad.5 pad.27 R24.1 U1.76 | length 974.2
  Top Layer w6: U1.76 3352,3827 pad.27 ; R24.1 pad.5
  Bottom Layer w6: pad.5 3290,4815 3290,4920 JTAG_HEADER.3
TDO_DSP: JTAG_HEADER.7 pad.26 U1.77 | length 465
  Top Layer w6: U1.77@2902.8,3845 3290,3845 pad.26
TEMPSENSE: P4.1 U2.5 | length 1403.5
  Top Layer w6: v1(2650,2070) 2805,2070 2980,1895 P4.1
  Bottom Layer w6: v1(2650,2070) 2645,2075 2595,2075 2585,2085 2585,2255 2650,2255 2800,2405 2800,2605 U2.5
TMS_DSP: JTAG_HEADER.1 pad.4 pad.24 R25.1 U1.79 | length 715.6
  Top Layer w6: U1.79 2902.2,3885 3070,3885 3090,3865 3150,3865 pad.24 ; R25.1 pad.4
  Bottom Layer w6: pad.4 3340,4800 3390,4850 3390,4920 JTAG_HEADER.1
TRSTN_DSP: C41.2 JTAG_HEADER.2 pad.8 pad.25 R29.1 R41.1 U1.78 | length 1010.9
  Top Layer w6: U1.78 3068.6,3866.4 3080,3855 3225,3855 pad.25 ; pad.8 R29.1
  Bottom Layer w6: JTAG_HEADER.2 3485,4825 pad.8
UART_RXD: P3.2 U1.113
UART_TXD: P3.1 U1.114
XA0: U1.151
XA1: U1.152
XA2: U1.153
XA3: U1.156
XA4: U1.157
XA5: U1.158
XA6: U1.161
XA7: U1.162
XA8: U1.163
XA9: U1.164
XA10: U1.165
XA11: U1.168
XA12: "DSP BOOT.2" R35.2 U1.169
XA13: "DSP BOOT.4" R36.2 U1.172
XA14: "DSP BOOT.6" R37.2 U1.173
XA15: "DSP BOOT.8" R38.2 U1.174
XA16: U1.175
XA17: U1.176
XA18: U1.1
XA19: U1.2
XCLKIN: R30.2 U1.105
XCLKOUT: R39.2
XD0: U1.136
XD1: U1.135
XD2: U1.134
XD3: U1.133
XD4: U1.132
XD5: U1.131
XD6: U1.130
XD7: U1.129
XD8: U1.128
XD9: U1.127
XD10: U1.124
XD11: U1.123
XD12: U1.122
XD13: U1.119
XD14: U1.116
XD15: U1.115
XRDN: U1.149
XREADY: U1.142
XRSN: pad.2 pad.23 R2.1 U1.80 U7.18 | length 794.9
  Top Layer w6: U1.80@2901.8,3905 pad.23 ; U7.18 4231.81,4213.19 pad.2 4255,4190 4515,4190 R2.1
XRWN: U1.148
XWEN: U1.137
XZCS0N: U1.145
XZCS6N: U1.141
XZCS7N: U1.150
pads on no net: TRS.3 TRS.5 U1.81 U1.82 U1.102 U7.4 U7.5 U7.8 U7.17 U7.20

## Text inside footprints (layer, text, board x,y; h text height)
"DSP BOOT": Top Overlay "2" at 13705,3815 h50 r90; Top Overlay "1" at 13805,3835 h50 r90; Top Overlay "7" at 13805,4275 h50 r90; Top Overlay "8" at 13705,4275 h50 r90
JTAG_HEADER: Top Overlay "2" at 3560,4890 h50 r180; Top Overlay "1" at 3560,4990 h50 r180; Top Overlay "14" at 2760,4890 h50 r180; Top Overlay "13" at 2760,4990 h50 r180